# Altium PCB N303-3V1.0.pcbdoc (part 1 of 3)
Units mm, origin at the board's own origin, x right, y up, seen from the top; angles counter-clockwise.
Board outline 100 x 100 mm, 2 copper layers (Top Layer, Bottom Layer); 92 components, 15 nets, 360 pads, 304 vias.
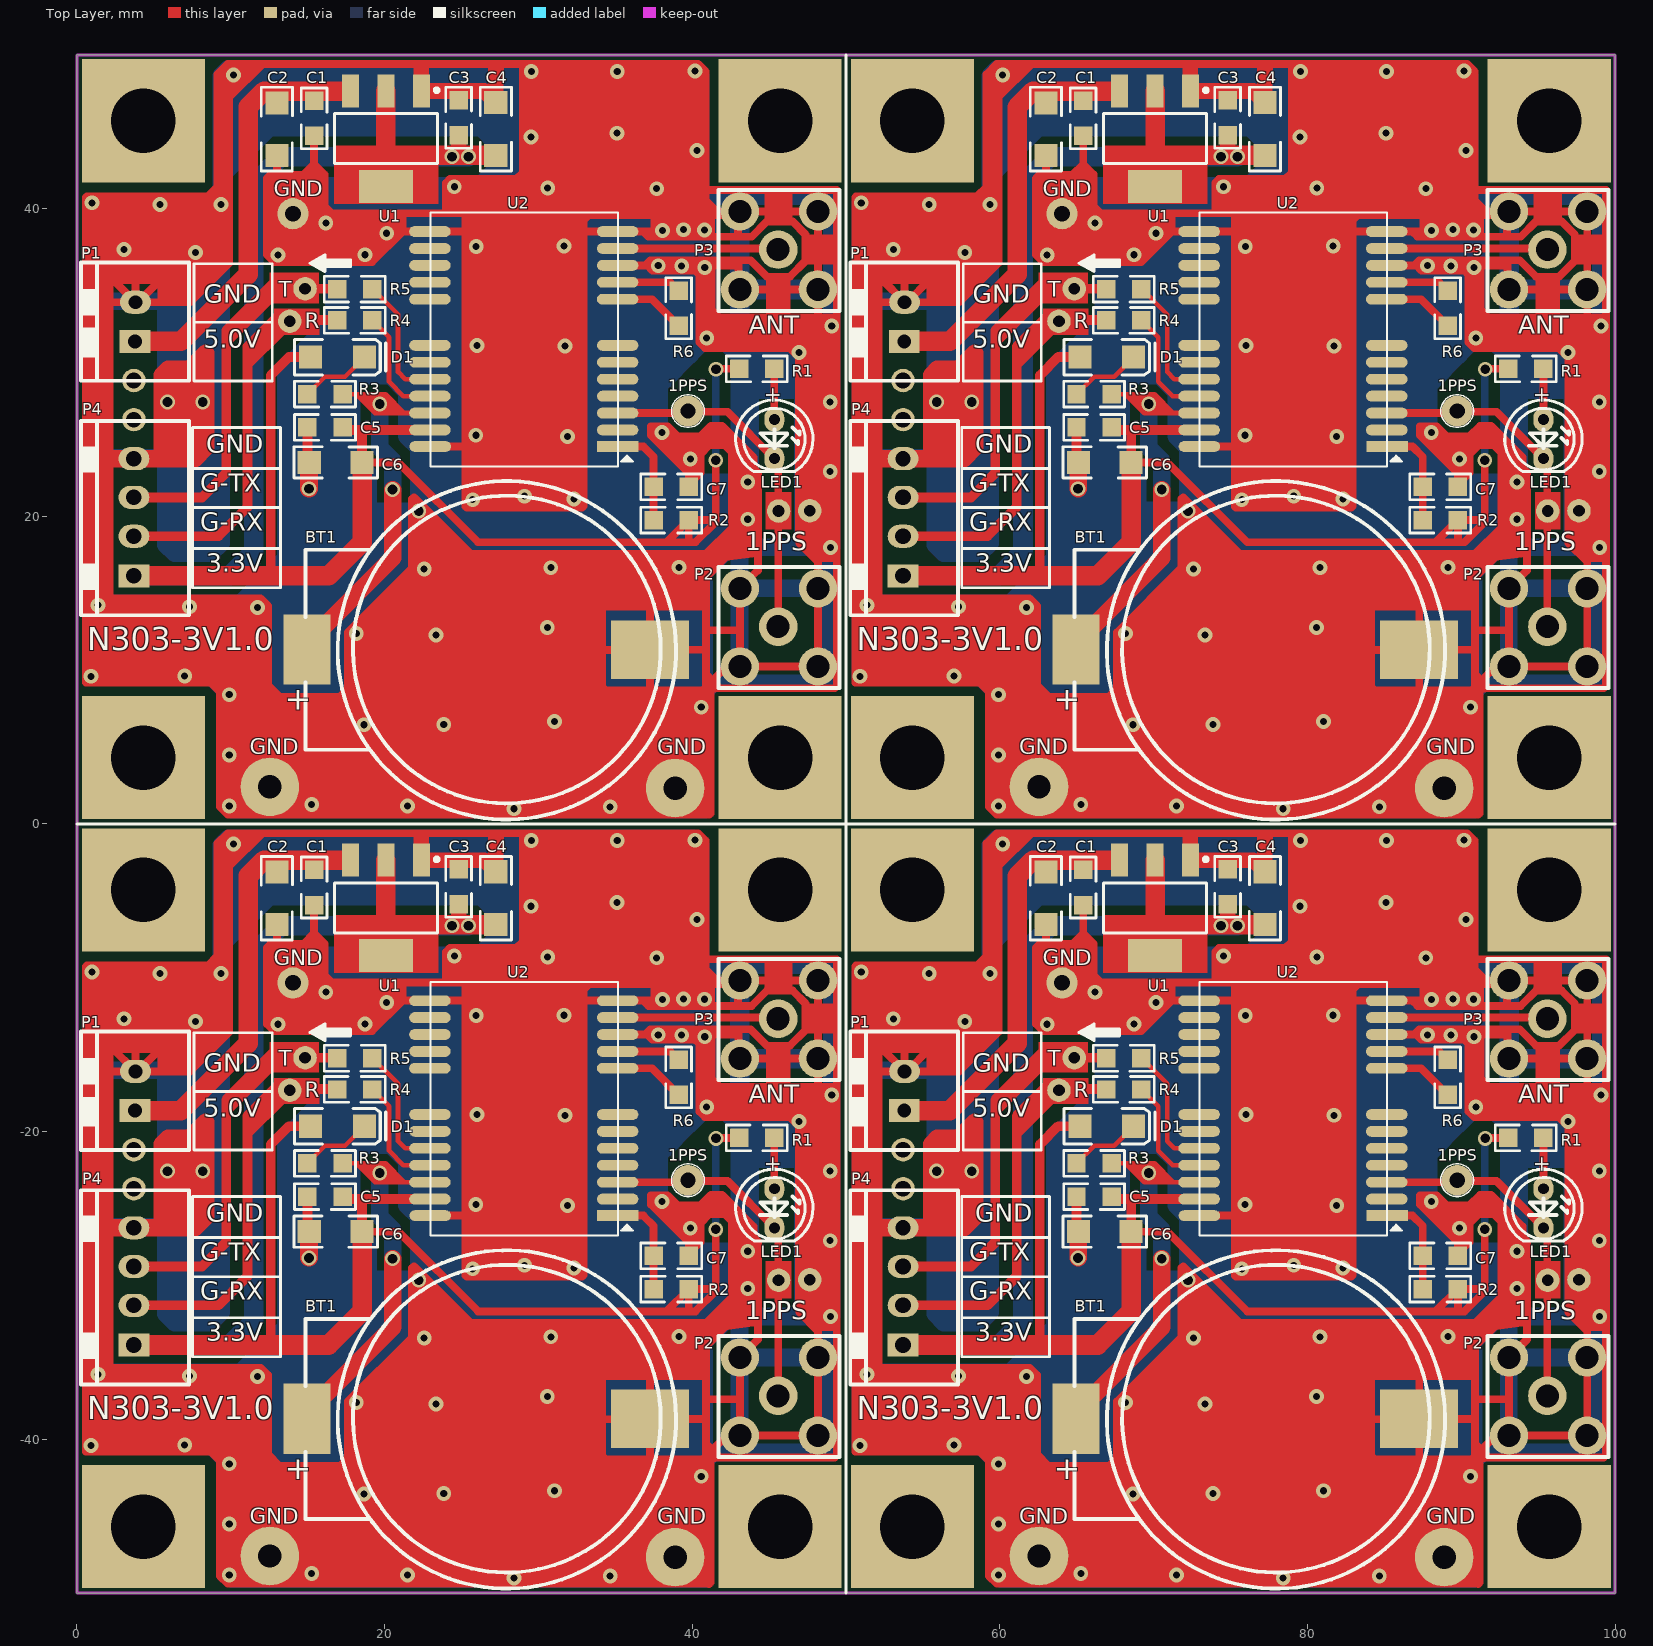
[diagram p0: Top Layer view]
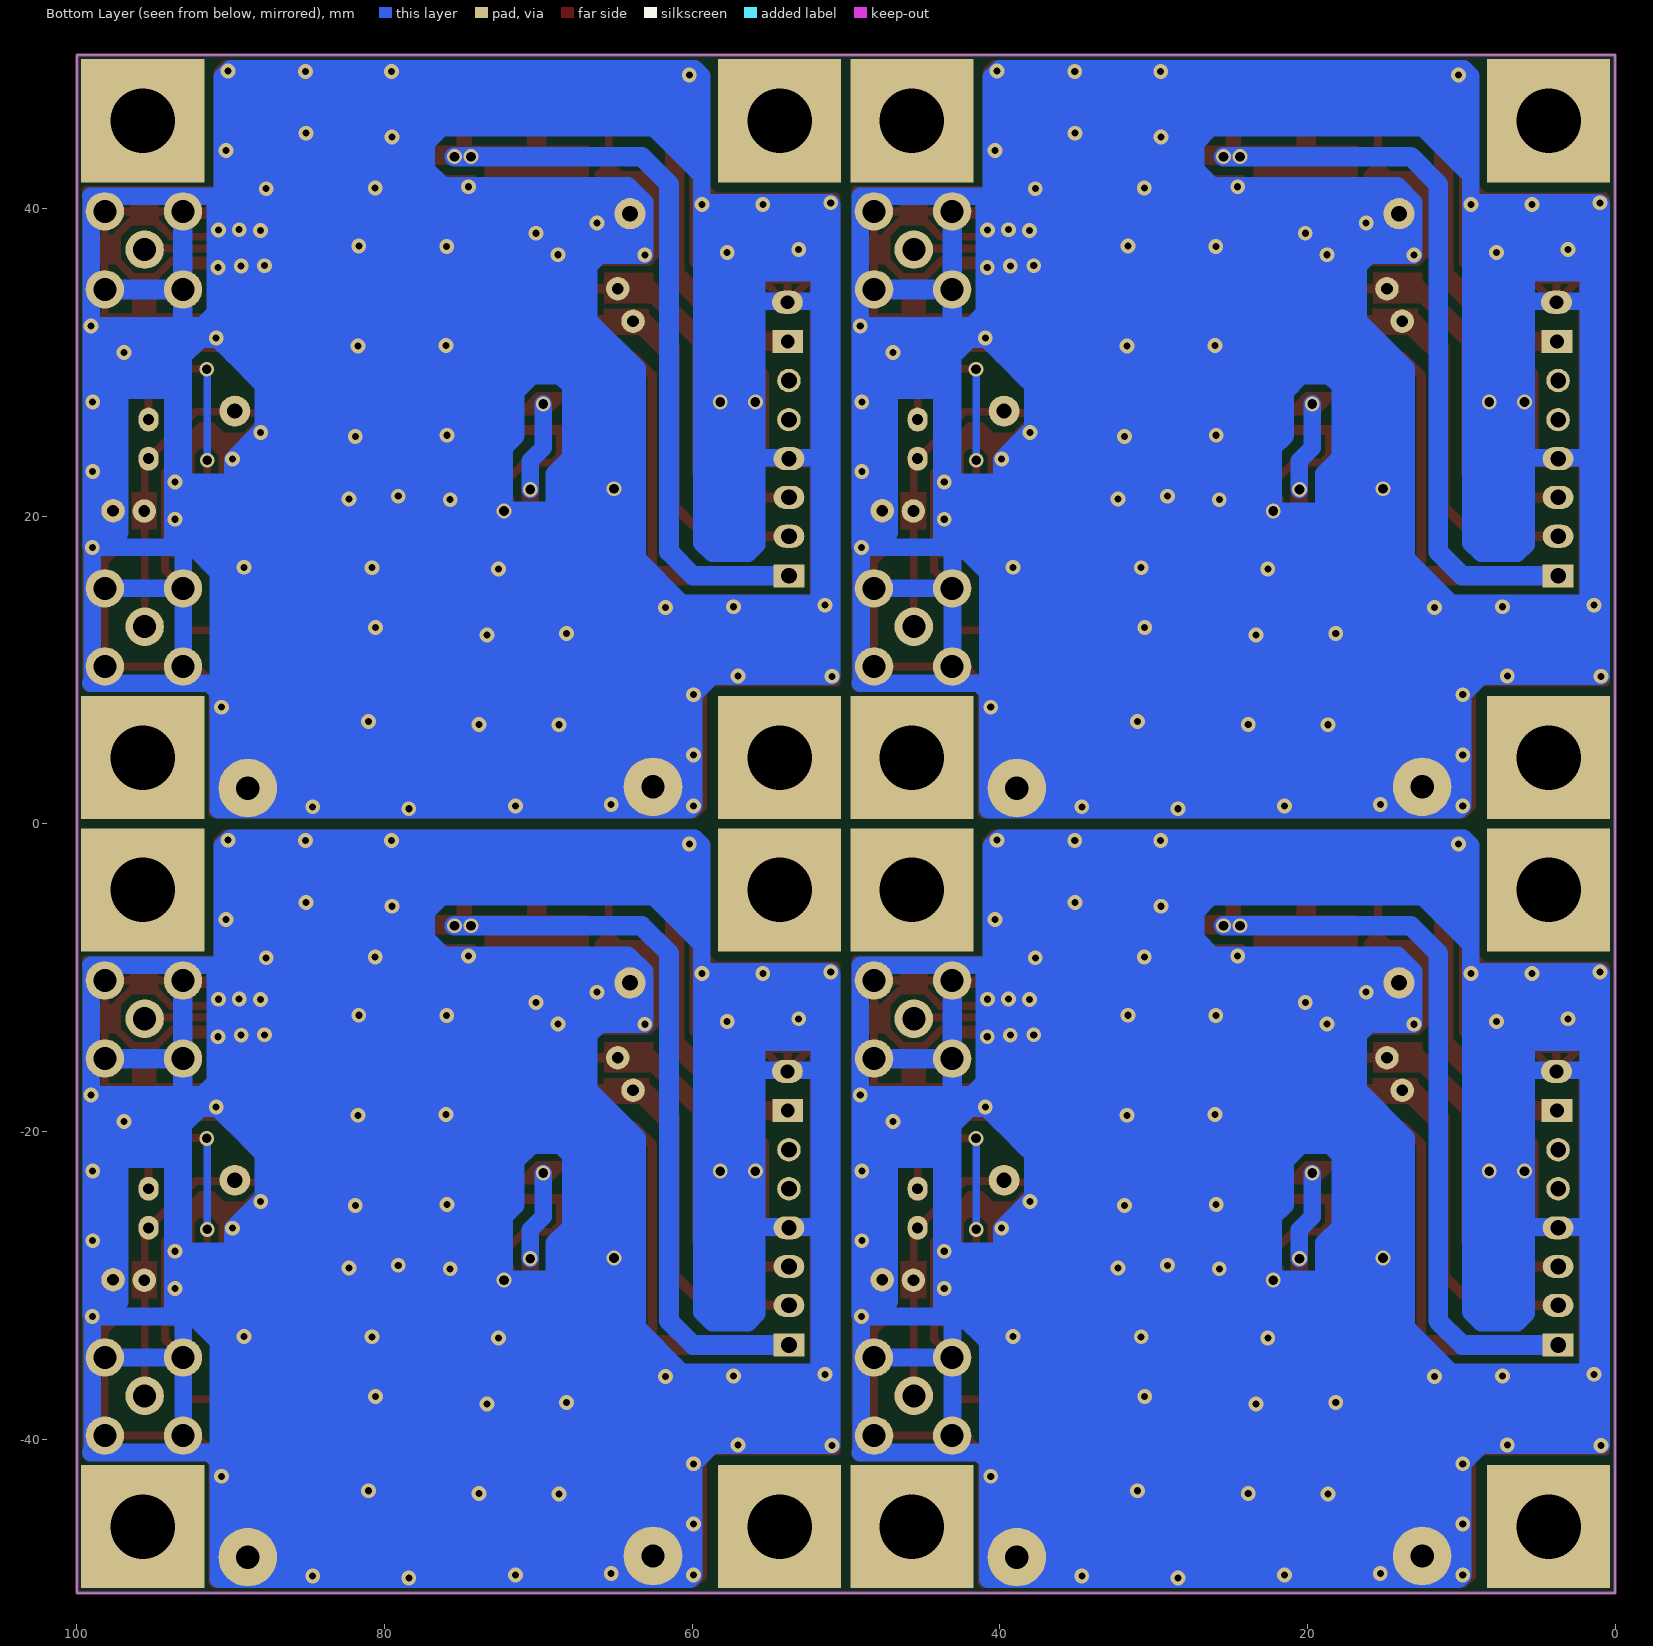
[diagram p1: Bottom Layer view, seen from below]

## Layer stack, top to bottom
Top Solder: solder mask 0.0102, Solder Resist, Dk 3.5
Top Layer: signal copper 0.0356
Dielectric 1: dielectric 0.32, FR-4, Dk 4.8
Bottom Layer: signal copper 0.0356
Bottom Solder: solder mask 0.0102, Solder Resist, Dk 3.5

## Board outline
0,50 100,50 100,-50 0,-50

## Design rules (kind name [scope] priority, off if disabled: settings)
Clearance [All] p1: gap=0.254
ComponentClearance [All] p1 off: gap=0.254 collisioncheckmode=3 verticalgap=0.254 showdistances=FALSE
PolygonConnect [All] p1: connectstyle=Relief reliefconductorwidth=0.254 reliefentries=4 polygonreliefangle="90 Angle" airgapwidth=0.254
RoutingVias [All] p1: holewidth=0.711 width=1.27 viastyle="Through Hole" minholewidth=0.711 minwidth=1.27 maxholewidth=0.711 maxwidth=1.27
SilkToBoardRegionClearance [All] p1 off:
SilkToSilkClearance [All] p1 off: silktosilkclearance=0.254
SilkToSolderMaskClearance [IsPad] p1 off: minsilkscreentomaskgap=0.254 clearancetoexposedcopper=TRUE
SolderMaskExpansion [All] p1: expansion=0.102
Width [All] p1: maxlimit=2.54 minlimit=0.254 preferedwidth=0.254 minimp=50.000000 maximp=50.000000 favimp=50.000000
26 further rules are at their usual default settings.

## Classes and differential pairs
component class N303-3V1.0: 1PPS BT1 C1 C2 C3 C4 C5 C6 C7 D1 LED1 P1 P2 P3 P4 R1 R2 R3 R4 R5 R6 U1 U2

## Components (designator, comment, footprint, x,y, rotation, side; value= is the part's Value field where it differs from the comment)
1PPS "TEST" 测试点（圆形） 89.726,-23.152 r0 top
1PPS "TEST" 测试点（圆形） 89.726,26.848 r0 top
1PPS "TEST" 测试点（圆形） 39.726,-23.152 r0 top
1PPS "TEST" 测试点（圆形） 39.726,26.848 r0 top
BT1 "电池座 小" "电池座 2032 贴片 BS-8" 88.964,-38.672 r90 top locked
BT1 "电池座 小" "电池座 2032 贴片 BS-8" 88.964,11.328 r90 top locked
BT1 "电池座 小" "电池座 2032 贴片 BS-8" 38.964,-38.672 r90 top locked
BT1 "电池座 小" "电池座 2032 贴片 BS-8" 38.964,11.328 r90 top locked
C1 "0.1uF" 0805 65.418,-5.271 r90 top
C1 "0.1uF" 0805 65.418,44.729 r90 top
C1 "0.1uF" 0805 15.418,-5.271 r90 top
C1 "0.1uF" 0805 15.418,44.729 r90 top
C2 "10uF" 1206 63.005,-6.541 r90 top
C2 "10uF" 1206 63.005,43.459 r90 top
C2 "10uF" 1206 13.005,-6.541 r90 top
C2 "10uF" 1206 13.005,43.459 r90 top
C3 "0.1uF" 0805 74.816,-2.944 r270 top
C3 "0.1uF" 0805 74.816,47.056 r270 top
C3 "0.1uF" 0805 24.816,-2.944 r270 top
C3 "0.1uF" 0805 24.816,47.056 r270 top
C4 "10uF" 1206 77.229,-3.112 r270 top
C4 "10uF" 1206 77.229,46.888 r270 top
C4 "10uF" 1206 27.229,-3.112 r270 top
C4 "10uF" 1206 27.229,46.888 r270 top
C5 "0.1uF" 0805 64.986,-24.219 r0 top
C5 "0.1uF" 0805 64.986,25.781 r0 top
C5 "0.1uF" 0805 14.986,-24.219 r0 top
C5 "0.1uF" 0805 14.986,25.781 r0 top
C6 "10uF" 1206 65.113,-26.505 r0 top
C6 "10uF" 1206 65.113,23.495 r0 top
C6 "10uF" 1206 15.113,-26.505 r0 top
C6 "10uF" 1206 15.113,23.495 r0 top
C7 "0.1uF" 0805 89.776,-28.08 r180 top
C7 "0.1uF" 0805 89.776,21.92 r180 top
C7 "0.1uF" 0805 39.776,-28.08 r180 top
C7 "0.1uF" 0805 39.776,21.92 r180 top
D1 "1N5819" "二极管 贴片 IN4148" 65.2,-19.647 r0 top
D1 "1N5819" "二极管 贴片 IN4148" 65.2,30.353 r0 top
D1 "1N5819" "二极管 贴片 IN4148" 15.2,-19.647 r0 top
D1 "1N5819" "二极管 贴片 IN4148" 15.2,30.353 r0 top
LED1 "红色" LED5_单色 95.339,-23.711 r270 top
LED1 "红色" LED5_单色 95.339,26.289 r270 top
LED1 "红色" LED5_单色 45.339,-23.711 r270 top
LED1 "红色" LED5_单色 45.339,26.289 r270 top
P1 "XH2.54-2" VH2.54_2 53.784,-18.631 r270 top
P1 "XH2.54-2" VH2.54_2 53.784,31.369 r270 top
P1 "XH2.54-2" VH2.54_2 3.784,-18.631 r270 top
P1 "XH2.54-2" VH2.54_2 3.784,31.369 r270 top
P2 "SMA" "天线座 50ohm 直立" 95.593,-37.173 r0 top
P2 "SMA" "天线座 50ohm 直立" 95.593,12.827 r0 top
P2 "SMA" "天线座 50ohm 直立" 45.593,-37.173 r0 top
P2 "SMA" "天线座 50ohm 直立" 45.593,12.827 r0 top
P3 "SMA" "天线座 50ohm 直立" 95.593,-12.662 r0 top
P3 "SMA" "天线座 50ohm 直立" 95.593,37.338 r0 top
P3 "SMA" "天线座 50ohm 直立" 45.593,-12.662 r0 top
P3 "SMA" "天线座 50ohm 直立" 45.593,37.338 r0 top
P4 "XH2.54-4" VH2.54_4 53.708,-33.871 r270 top
P4 "XH2.54-4" VH2.54_4 53.708,16.129 r270 top
P4 "XH2.54-4" VH2.54_4 3.708,-33.871 r270 top
P4 "XH2.54-4" VH2.54_4 3.708,16.129 r270 top
R1 "1K" 0805 93.053,-20.409 r0 top
R1 "1K" 0805 93.053,29.591 r0 top
R1 "1K" 0805 43.053,-20.409 r0 top
R1 "1K" 0805 43.053,29.591 r0 top
R2 "10K" 0805 89.776,-30.239 r180 top
R2 "10K" 0805 89.776,19.761 r180 top
R2 "10K" 0805 39.776,-30.239 r180 top
R2 "10K" 0805 39.776,19.761 r180 top
R3 "100" 0805 64.986,-22.06 r0 top
R3 "100" 0805 64.986,27.94 r0 top
R3 "100" 0805 14.986,-22.06 r0 top
R3 "100" 0805 14.986,27.94 r0 top
R4 "0" 0805 66.916,-17.259 r0 top
R4 "0" 0805 66.916,32.741 r0 top
R4 "0" 0805 16.916,-17.259 r0 top
R4 "0" 0805 16.916,32.741 r0 top
R5 "0" 0805 66.916,-15.227 r0 top
R5 "0" 0805 66.916,34.773 r0 top
R5 "0" 0805 16.916,-15.227 r0 top
R5 "0" 0805 16.916,34.773 r0 top
R6 "0" 0805 89.116,-17.615 r90 top
R6 "0" 0805 89.116,32.385 r90 top
R6 "0" 0805 39.116,-17.615 r90 top
R6 "0" 0805 39.116,32.385 r90 top
U1 "SPX1117M3-3.3" SOT223 72.403,-2.35 r180 top
U1 "SPX1117M3-3.3" SOT223 72.403,47.65 r180 top
U1 "SPX1117M3-3.3" SOT223 22.403,-2.35 r180 top
U1 "SPX1117M3-3.3" SOT223 22.403,47.65 r180 top
U2 "N303-3" "模块 N303-3" 85.179,-26.759 r90 top
U2 "N303-3" "模块 N303-3" 85.179,23.241 r90 top
U2 "N303-3" "模块 N303-3" 35.179,-26.759 r90 top
U2 "N303-3" "模块 N303-3" 35.179,23.241 r90 top

## Footprints (in the part's own frame and the unit in brackets; to place one, negate y for a bottom-side part, rotate by r counter-clockwise, add the part's x,y. Pads: shape width x height; smd on the part's side, far side on the other; paste and mask are expansions set on the pad)
0805 [mm]
  rect 1.2x1.2 smd: 1(0,0) 2(2.286,0)
  silkscreen extent -0.84,-0.84 3.12,0.84
1206 [mm]
  rect 1.5x1.5 smd: 1(-0.005,0) 2(3.424,0)
  silkscreen extent -1.01,-1.01 4.43,1.02
LED5_单色 [mm]
  oval 1.554x1.3 hole 0.711: 1(0,0) 2(2.54,0)
  silkscreen extent -1.27,-2.51 3.39,2.51
SOT223 [mm] "SOT-223/SC-73; 4 Leads; Body 6.7 x 7.3 mm, inc. leads (LxW max)"
  rect 1.1x2.15 smd: 1(0.011,-0.001) 2(2.311,-0.001) 3(4.611,-0.001)
  rect 3.5x2.15 smd: 4(2.311,6.199)
  silkscreen extent -1.11,-0.18 5.66,4.72
VH2.54_2 [mm]
  rect 1.5x2 hole 0.9: 1(0,0)
  oval 1.5x2 hole 0.9: 2(-2.55,0.025)
  silkscreen extent -5.14,-3.51 2.56,3.51
VH2.54_4 [mm]
  rect 1.5x2 hole 1.016: 1(0,0)
  oval 1.5x2 hole 1.016: 2(-2.58,0) 3(-5.105,0)
  oval 1.5x2 hole 1: 4(-7.62,0)
  silkscreen extent -10.06,-3.43 2.56,3.58
"二极管 贴片 IN4148" [mm] "SMT LED; 2 Flat Leads"
  rect 1.5x1.5 smd: 1(0,0) 2(3.5,0)
  silkscreen extent -1.04,-1.15 4.88,1.15
"天线座 50ohm 直立" [mm]
  round 2.5 hole 1.5: 1(0,0) 2(-2.49,-2.59) 2(-2.49,2.49) 2(2.584,-2.584) 2(2.59,2.49)
  silkscreen extent -3.89,-3.99 3.99,3.89
"模块 N303-3" [mm]
  rect 0.7x2.7 smd: 1(1.3,0.005)
  oval 0.7x2.7 smd: 2(2.375,0.025) 3(3.475,0.025) 4(4.575,0.025) 5(5.675,0.025) 6(6.775,0.025) 7(7.875,0.025) 8(10.875,0.029) 9(11.975,0.025) 10(13.075,0.025) 11(14.175,0.025) 12(15.275,0.025) 13(15.275,12.225) 14(14.175,12.225) 15(13.075,12.225) 16(11.975,12.225) 17(10.875,12.229) 18(7.875,12.225) 19(6.775,12.225) 20(5.675,12.225) 21(4.575,12.225) 22(3.475,12.225) 23(2.375,12.225) 24(1.3,12.205)
  silkscreen extent 0,-0.97 16.5,12.2
测试点（圆形） [mm]
  round 2 hole 1: 1(0,0)
  silkscreen extent -1.07,-1.06 1.07,1.06
"电池座 2032 贴片 BS-8" [mil]
  rect 180x120 smd: 1(0.5,944.88)
  rect 150x200 smd: 2(0,67)
  silkscreen extent -434,0 431,949

## Part data
1PPS 1PPS 1PPS 1PPS: library part 测试点_小
C1 C1 C1 C1 C2 C2 C2 C2 C3 C3 C3 C3 C4 C4 C4 C4 C5 C5 C5 C5 C6 C6 C6 C6 C7 C7 C7 C7: library part "电容 贴片 0805"
D1 D1 D1 D1: library part "二极管 贴片 1N4148"
LED1 LED1 LED1 LED1: library part "贴片发光二极管 0805"
P1 P1 P1 P1: library part "连接件 XH2.54-2"
P2 P2 P2 P2 P3 P3 P3 P3: library part "联结件 天线座 SMA"
P4 P4 P4 P4: library part "联结件 XH2.54-4"
R1 R1 R1 R1 R2 R2 R2 R2 R3 R3 R3 R3 R4 R4 R4 R4 R5 R5 R5 R5 R6 R6 R6 R6: library part "电阻 贴片 0805"
U1 U1 U1 U1: library part "贴片芯片 SPX1117M3-3.3", "LDO"
U2 U2 U2 U2: library part "模块 N303-3"

## Free pads (board coordinates)
  round 1.524 hole 1.016: 0(3.708,-23.711) 0(3.708,26.289) 0(53.708,-23.711) 0(53.708,26.289) 1(3.708,-21.171) 1(3.708,28.829) 1(53.708,-21.171) 1(53.708,28.829)
  round 3.81 hole 1.524: 2(12.548,-47.587) 2(12.548,2.413) 2(38.887,-47.663) 2(38.887,2.337) 2(62.548,-47.587) 2(62.548,2.413) 2(88.887,-47.663) 2(88.887,2.337)
  round 1.524 hole 0.762: 3(13.843,-17.31) 3(13.843,32.69) 3(14.834,-15.202) 3(14.834,34.798) 3(45.618,-29.655) 3(45.618,20.345) 3(47.65,-29.629) 3(47.65,20.371) 3(63.843,-17.31) 3(63.843,32.69) 3(64.834,-15.202) 3(64.834,34.798) 3(95.618,-29.655) 3(95.618,20.345) 3(97.65,-29.629) 3(97.65,20.371)
  round 2.032 hole 1.016: 3(14.046,-10.325) 3(14.046,39.675) 3(64.046,-10.325) 3(64.046,39.675)
  rect 8x8 hole 4.2: ""(4.318,-45.682) ""(4.318,-4.28) ""(4.318,4.318) ""(4.318,45.72) ""(45.72,-45.682) ""(45.72,-4.28) ""(45.72,4.318) ""(45.72,45.72) ""(54.318,-45.682) ""(54.318,-4.28) ""(54.318,4.318) ""(54.318,45.72) ""(95.72,-45.682) ""(95.72,-4.28) ""(95.72,4.318) ""(95.72,45.72)

## Via types
v1: diameter 0.965, hole 0.457, Top Layer to Bottom Layer, 264 vias
v2: diameter 0.965, hole 0.635, Top Layer to Bottom Layer, 40 vias

## Nets (pads, with @x,y where several pads share a name; then routed paths per layer and width w, separated by ;. In a path a pad name is that pad's centre, name@x,y a point inside that pad or via, vN(x,y) a via of type N, cw(c..) or ccw(c..) an arc to the next point about the centre after c; other vN are vias at no path point)
3.3V: C3.2@24.816,44.77 C4.2@27.229,43.464 C5.2@17.272,25.781 C6.2@18.537,23.495 D1.1@15.2,30.353 P4.1@3.708,16.129 R1.1@43.053,29.591 R2.1@39.776,19.761 U1.2@20.091,47.652 U1.4@20.091,41.452 U2.23@22.954,25.616 | length 148.9
  Top Layer w0.508: C6.2@18.537,23.495 20.904,23.495 26.086,18.313 38.329,18.313 ; v2(41.529,23.647) 41.529,19.634 ; v2(41.554,29.566) 41.58,29.591 R1.1@43.053,29.591 ; 38.329,18.313 39.802,18.313 ; 38.329,18.313 R2.1@39.776,19.761 ; R2.1@39.776,19.761 39.776,18.339 39.802,18.313 ; R2.1@39.776,19.761 41.402,19.761 41.529,19.634 ; 39.802,18.313 40.208,18.313 41.529,19.634
  Top Layer w0.635: 12.598,16.332 12.598,29.159 13.792,30.353 D1.1@15.2,30.353 ; C5.2@17.272,25.781 17.437,25.616 18.567,25.616 ; C6.2@18.537,23.495 18.537,25.585 18.567,25.616 ; U2.23@22.954,25.616 18.567,25.616
  Top Layer w1.016: v2@24.79,43.464 24.816,43.49 C3.2@24.816,44.77
  Top Layer w1.27: P4.1@3.708,16.129 16.358,16.129 18.537,18.308 C6.2@18.537,23.495 ; U1.4@20.091,41.452 20.091,43.485 ; U1.2@20.091,47.652 20.091,43.485 ; C4.2@27.229,43.464 24.79,43.464 20.112,43.464 20.091,43.485
  Bottom Layer w0.508: v2(41.529,23.647) 41.529,29.54 v2(41.554,29.566)
  Bottom Layer w1.27: P4.1@3.708,16.129 9.931,16.129 11.506,17.704 11.506,41.605 13.284,43.383 v2(25.451,43.383)
  other v2: 24.384,43.383
5V: C1.2@15.418,47.015 C2.2@13.005,46.883 P1.1@3.784,31.369 U1.3@17.791,47.652 | length 28.3
  Top Layer w1.27: P1.1@3.784,31.369 6.756,31.369 11.125,35.738 11.125,46.609 12.167,47.65 ; 11.151,46.634 12.167,47.65 ; U1.3@17.501,47.65 12.167,47.65
GND: BT1.2@37.262,11.328 C1.1@15.418,44.729 C2.1@13.005,43.454 C3.1@24.816,47.056 C4.1@27.229,46.893 C5.1@14.986,25.781 C6.1@15.108,23.495 C7.1@39.776,21.92 P1.2@3.809,33.919 P2.2@43.103,10.237 P2.2@43.103,15.317 P2.2@48.177,10.243 P2.2@48.183,15.317 P3.2@43.103,34.748 P3.2@43.103,39.828 P3.2@48.177,34.754 P3.2@48.183,39.828 P4.4@3.708,23.749 pad.2@12.548,2.413 pad.2@38.887,2.337 pad.3@14.046,39.675 pad.3@47.65,20.371 U1.1@22.391,47.652 U2.10@35.154,36.316 U2.12@35.154,38.516 U2.13@22.954,38.516 U2.24@22.974,24.541 | length 1381.2
  Top Layer w0.508: 5.512,35.458 5.486,35.433 ; 7.315,34.265 7.264,34.214 5.486,34.214 ; 8.103,35.052 8.001,34.95 5.486,34.95 ; C2.1@13.005,43.454 13.005,42.189 ; C1.1@15.418,44.729 15.418,42.901 ; 21.793,21.133 21.793,17.551 ; 21.92,21.234 25.629,17.526 ; U2.24@22.974,24.541 25.273,24.541 ; 26.086,24.536 26.081,24.541 25.273,24.541 ; 33.579,39.878 33.299,39.599 ; U2.10@35.154,36.316 36.951,36.316 ; v1@37.719,38.456 37.659,38.516 36.822,38.516 ; C7.1@39.776,21.92 C7.1@39.776,22.073 ; 41.707,17.323 40.894,16.51 ; 42.189,17.348 40.894,16.053 ; P3.2@42.545,39.599 33.299,39.599 ; P3.2@48.177,34.754 48.171,34.748 45.618,34.748 ; 1.651,40.792 0.648,40.792 0.597,40.742 0.597,9.195 8.712,9.195 9.296,8.611 9.296,1.118 9.804,0.61 40.792,0.61 ; 1.651,40.792 2.134,40.31 2.134,35.458 ; 1.651,40.792 4.267,40.792 ; 2.134,33.96 2.134,23.749 2.134,14.732 2.21,14.656 11.938,14.656 12.421,14.173 12.421,9.017 13.183,8.255 17.094,8.255 17.628,8.788 17.628,12.471 21.793,16.637 21.793,17.551 ; 2.134,33.96 2.134,35.458 ; 2.134,33.96 2.174,33.919 P1.2@3.809,33.919 ; 2.134,35.458 2.27,35.458 P1.2@3.809,33.919 ; P1.2@3.809,33.919 3.809,40.334 4.216,40.742 ; P1.2@3.809,33.919 P1.2@3.972,33.919 ; P1.2@3.972,33.919 5.486,33.919 ; P1.2@3.972,33.919 5.486,35.433 ; 4.216,40.742 8.458,40.742 8.509,40.792 ; 4.216,40.742 4.267,40.792 ; 4.267,40.792 8.509,40.792 ; 5.486,33.919 5.486,34.214 ; 5.486,33.919 7.351,33.919 7.887,34.455 ; 5.486,34.214 5.486,34.569 ; 5.486,34.569 5.486,34.95 ; 5.486,34.569 7.772,34.569 7.887,34.455 ; 5.486,34.95 5.486,35.433 ; 7.887,34.455 9.906,36.474 9.906,47.244 12.065,49.403 ; 8.509,40.792 9.144,41.427 9.144,48.743 9.804,49.403 12.065,49.403 ; 12.065,49.403 29.083,49.403 ; 13.005,42.189 13.005,37.211 13.691,36.525 ; 13.005,42.189 14.707,42.189 ; 13.005,42.189 12.573,42.189 12.344,41.961 12.344,37.008 12.827,36.525 13.691,36.525 ; 13.691,36.525 19.177,36.525 21.167,38.516 ; 14.707,42.189 15.443,42.189 ; 14.707,42.189 15.418,42.901 ; 15.418,42.901 15.418,42.215 15.443,42.189 ; 15.418,42.901 16.104,42.215 ; 15.443,42.189 16.078,42.189 16.104,42.215 ; 16.104,42.215 16.104,40.157 16.561,39.7 21.234,39.7 ; 21.167,38.516 21.167,39.633 21.234,39.7 ; 21.167,38.516 U2.13@22.954,38.516 25.273,38.516 ; 21.234,39.7 23.876,39.7 ; 21.793,17.551 21.819,17.526 25.629,17.526 ; 23.876,39.7 25.273,39.7 ; 23.876,39.7 24.003,39.827 24.003,41.681 24.257,41.935 28.575,41.935 28.981,42.342 ; 25.273,24.541 25.273,38.516 ; 25.273,24.541 25.273,20.65 25.349,20.574 32.842,20.574 32.944,20.676 32.944,38.516 ; 25.273,38.516 25.527,38.516 ; 25.273,38.516 25.273,39.7 ; 25.273,39.7 25.502,39.7 ; 25.502,39.7 27.737,39.7 28.981,40.945 28.981,42.342 ; 25.502,39.7 25.502,38.541 25.527,38.516 ; 25.527,38.516 32.766,38.516 ; 25.629,17.526 25.654,17.551 40.894,17.551 ; 28.981,42.342 28.981,49.301 29.083,49.403 ; 29.083,49.403 40.386,49.403 40.869,48.92 40.869,41.046 ; 32.766,38.516 32.944,38.516 ; 32.766,38.516 32.766,39.243 33.122,39.599 33.299,39.599 ; 32.944,38.516 U2.12@35.154,38.516 36.822,38.516 ; 32.944,38.516 32.944,39.243 33.299,39.599 ; 34.036,11.303 34.036,13.868 34.29,14.122 37.262,14.122 ; 34.036,11.303 34.036,9.017 34.366,8.687 37.313,8.687 ; 34.036,11.303 37.236,11.303 BT1.2@37.262,11.328 ; 36.822,38.516 37.16,38.178 42.977,38.178 ; 36.951,36.316 37.076,36.316 ; 36.951,36.316 37.289,36.654 43.002,36.654 ; 37.076,36.316 41.377,36.316 ; 37.076,36.316 37.414,35.978 38.568,35.978 38.583,35.992 40.183,35.992 40.462,35.712 40.462,31.318 40.843,30.937 46.355,30.937 46.965,30.328 46.965,18.262 48.183,17.043 ; BT1.2@37.262,11.328 37.262,14.122 ; BT1.2@37.262,11.328 37.262,8.738 37.313,8.687 ; BT1.2@37.262,11.328 40.818,11.328 40.894,11.405 ; 37.262,14.122 40.894,14.122 ; 37.313,8.687 40.792,8.687 ; C7.1@39.776,22.073 39.776,22.809 37.313,25.273 37.313,25.857 38.405,25.857 39.065,25.197 40.538,25.197 41.224,25.883 41.935,25.883 43.993,23.825 43.993,23.139 44.272,22.86 44.272,16.486 P2.2@43.103,15.317 43.103,12.497 ; C7.1@39.776,22.073 40.538,22.835 40.538,24.058 41.119,24.638 42.113,24.638 42.596,24.155 42.596,19.253 40.894,17.551 ; 40.792,0.61 40.792,8.687 ; 40.792,0.61 41.084,0.61 41.097,0.597 41.183,0.683 41.183,8.788 ; 40.792,0.61 40.894,0.711 40.894,8.788 ; 40.792,8.687 40.792,8.788 ; 40.792,8.687 40.894,8.788 ; 40.792,8.788 40.894,8.89 ; 40.792,8.788 40.894,8.788 ; 40.869,41.046 40.869,40.538 41.579,39.828 P3.2@43.103,39.828 ; 40.869,41.046 41.034,41.212 49.403,41.212 49.403,32.944 ; 40.894,8.788 41.183,8.788 ; 40.894,8.788 40.894,8.89 ; 40.894,8.89 41.307,9.303 ; 40.894,8.89 40.894,9.715 ; 40.894,9.715 40.894,11.405 ; 40.894,9.715 41.307,9.303 ; 40.894,11.405 40.894,12.598 ; 40.894,12.598 40.894,14.122 ; 40.894,12.598 43.001,12.598 43.103,12.497 ; 40.894,14.122 40.894,16.053 ; 40.894,16.053 40.894,16.51 ; 40.894,16.51 40.894,17.551 ; 41.183,8.788 41.472,8.788 41.51,8.826 41.783,8.826 ; 41.307,9.303 42.241,10.237 P2.2@43.103,10.237 ; 41.307,9.303 41.783,8.826 ; 41.377,36.316 42.996,36.316 43.002,36.322 ; 41.377,36.316 41.25,36.189 41.25,33.452 41.783,32.918 45.72,32.918 ; 41.783,8.826 49.263,8.826 49.403,8.966 49.403,32.944 ; 42.977,38.178 43.867,38.178 44.856,39.167 45.695,39.167 ; 42.977,38.178 42.977,39.702 P3.2@43.103,39.828 ; 43.002,36.322 43.002,36.654 ; 43.002,36.322 43.002,34.849 P3.2@43.103,34.748 45.618,34.748 ; 43.002,36.654 43.791,36.654 44.865,35.58 45.669,35.58 ; P2.2@43.103,10.237 43.103,12.497 ; P2.2@43.103,10.237 48.171,10.237 P2.2@48.177,10.243 48.183,10.249 P2.2@48.183,15.317 48.183,17.043 ; P3.2@43.103,39.828 45.669,39.828 ; 45.618,34.748 45.618,33.02 45.72,32.918 ; 45.618,34.748 45.669,34.799 45.669,35.58 ; 45.669,35.58 46.35,35.58 47.371,36.601 47.371,37.465 ; 45.669,39.828 P3.2@48.183,39.828 48.183,37.414 ; 45.669,39.828 45.695,39.803 45.695,39.167 ; 45.695,39.167 46.533,39.167 47.371,38.329 47.371,37.465 ; 45.72,32.918 48.183,32.918 ; 47.371,37.465 48.132,37.465 48.183,37.414 ; 48.183,17.043 48.183,32.918 ; 48.183,32.918 48.183,37.414 ; 48.183,32.918 49.378,32.918 49.403,32.944
  Top Layer w0.635: C5.1@14.986,25.781 14.986,23.617 C6.1@15.108,23.495
  Top Layer w1.016: 22.377,49.149 22.391,49.135 U1.1@22.391,47.652 26.471,47.652 C4.1@27.229,46.893 27.229,49.124 27.254,49.149
  Top Layer w1.143: 0.914,23.749 2.134,23.749 P4.4@3.708,23.749 7.645,23.749 8.382,24.486 8.382,30.607 7.341,29.566 5.944,29.566 5.563,29.185 5.563,24.003 5.385,23.825 ; v2(15.088,21.793) 15.088,23.475 C6.1@15.108,23.495
  Bottom Layer w0.508: 43.078,31.521 43.103,31.546 43.103,32.333 43.103,32.385
  Bottom Layer w1.143: v1(5.41,40.284) 5.791,39.903 5.791,33.985 ; v2(15.088,21.793) 16.535,20.345 18.948,20.345 ; 38.76,40.31 39.268,40.818 40.538,40.818 ; v1(40.945,31.598) v1@40.869,31.521 ; P2.2@43.103,10.237 43.078,10.262 43.078,17.983 ; P2.2@43.103,15.317 P2.2@48.183,15.317 ; v1(43.612,22.225) 43.078,22.225 ; v1@0.914,14.351 0.914,40.31 v1(0.991,40.386) 2.337,40.386 ; v1@0.914,14.351 v1(0.914,9.601) 1.753,9.601 ; v1@0.914,14.351 v1@1.753,14.351 ; 1.753,9.601 v1@1.753,14.351 ; 1.753,9.601 8.712,9.601 v1(9.906,8.407) v1(9.906,4.496) v1(9.906,1.168) 9.906,1.143 10.135,0.914 40.792,0.914 40.792,8.56 ; v1@1.753,14.351 1.753,23.8 ; v1@1.753,14.351 10.668,14.351 13.589,17.272 13.589,18.186 ; 1.753,23.8 1.753,33.985 ; 1.753,23.8 5.791,23.8 ; 1.753,33.985 1.753,39.802 2.337,40.386 ; 1.753,33.985 5.791,33.985 ; 2.337,40.386 9.271,40.386 v1(9.373,40.284) ; 5.791,23.8 5.791,33.985 ; 5.791,23.8 5.791,18.148 6.35,17.59 8.7,17.59 9.373,18.263 9.373,23.901 ; 5.791,23.8 9.271,23.8 9.373,23.901 ; 5.791,33.985 9.373,33.985 ; 9.373,23.901 9.373,33.985 ; 9.373,33.985 v1(9.373,40.284) ; v1(9.373,40.284) 9.373,42.139 ; 9.373,42.139 9.373,48.628 9.83,49.086 40.043,49.086 v1(40.183,48.946) 40.538,48.59 40.538,41.453 ; 9.373,42.139 12.497,45.263 26.289,45.263 27.28,44.272 27.28,42.57 26.187,41.478 ; 13.589,18.186 13.589,29.616 16.713,32.741 ; 13.589,18.186 13.792,17.983 22.25,17.983 ; 16.713,32.741 17.069,32.385 21.996,32.385 ; 16.713,32.741 16.713,36.271 16.002,36.982 v1(13.081,36.982) 13.081,40.411 14.148,41.478 26.187,41.478 ; 18.948,20.345 v2(22.225,20.345) ; 18.948,20.345 18.948,22.758 17.882,23.825 17.882,28.448 18.593,29.159 18.618,29.134 20.396,29.134 21.463,28.067 21.463,25.222 22.225,24.46 ; 21.996,32.385 41.834,32.385 ; 21.996,32.385 22.225,32.156 22.225,31.521 ; v2(22.225,20.345) 22.225,18.009 22.25,17.983 ; v2(22.225,20.345) 22.225,24.46 ; 22.225,24.46 22.225,31.521 ; 22.225,31.521 39.218,31.521 ; 22.25,17.983 42.443,17.983 ; 26.187,41.478 40.513,41.478 40.538,41.453 ; 37.871,28.524 37.871,29.591 ; 37.871,28.524 38.405,29.058 ; 37.871,28.524 37.871,25.629 v1(38.049,25.451) 38.151,25.451 v1(39.878,23.724) 39.878,22.682 39.827,22.631 40.234,22.225 43.078,22.225 ; 37.871,29.591 37.871,30.175 ; 37.871,29.591 38.405,29.058 ; 37.871,30.175 38.557,30.861 ; 37.871,30.175 39.522,30.175 ; 38.405,29.058 39.522,30.175 ; 38.557,30.861 39.218,31.521 ; 38.557,30.861 39.675,30.861 39.903,30.632 ; 39.218,31.521 39.903,31.521 ; 39.522,30.175 39.903,30.556 ; 39.903,30.556 39.941,30.594 ; 39.903,30.556 39.903,30.632 ; 39.903,30.632 39.941,30.594 ; 39.903,30.632 39.903,31.521 ; 39.903,31.521 v1@40.869,31.521 ; 39.941,30.594 v1@40.869,31.521 ; 40.538,40.818 41.173,40.818 ; 40.538,40.818 40.538,33.68 40.996,33.223 ; 40.538,40.818 40.538,41.453 ; 40.792,8.56 40.792,16.332 42.443,17.983 ; 40.792,8.56 40.794,8.56 41.378,9.143 49.086,9.143 48.997,9.232 v1(48.997,17.983) ; v1@40.869,31.521 41.961,31.521 ; 40.996,33.223 41.834,32.385 ; 40.996,33.223 40.996,40.64 41.173,40.818 ; 41.173,40.818 49.086,40.818 49.073,40.805 v1(49.073,32.385) ; 41.834,32.385 43.103,32.385 43.155,32.385 ; 41.961,31.521 43.078,31.521 ; 41.961,31.521 43.078,30.404 ; 42.443,17.983 43.078,17.983 ; 43.078,17.983 43.078,22.225 ; 43.078,17.983 43.866,17.983 ; 43.078,22.225 43.078,30.404 ; 43.078,30.404 43.078,31.521 ; 43.078,31.521 43.078,32.309 43.103,32.333 43.155,32.385 ; 43.155,32.385 43.764,32.385 ; 43.764,32.385 43.764,18.085 43.866,17.983 ; 43.764,32.385 47.168,32.385 ; 43.866,17.983 48.158,17.983 ; 47.168,32.385 48.133,32.385 ; 47.168,32.385 47.206,32.347 47.206,18.936 48.133,18.009 ; 48.133,18.009 48.133,32.385 ; 48.133,18.009 48.158,17.983 ; 48.133,32.385 v1(49.073,32.385) ; 48.158,17.983 v1(48.997,17.983) ; v1(48.997,17.983) 49.073,18.059 v1(49.073,32.385)
  Bottom Layer w1.27: 43.103,32.385 P3.2@43.103,34.748 ; P3.2@43.103,39.828 P3.2@43.103,34.748 ; P3.2@48.177,34.754 48.171,34.748 P3.2@43.103,34.748
  other v1: 28.423,0.991 34.671,1.118 21.488,1.168 15.265,1.27 18.669,6.452 23.851,6.477 31.039,6.655 40.589,7.595 7.01,9.627 23.343,12.294 18.161,12.395 30.582,12.776 11.735,14.072 7.315,14.122 1.372,14.224 22.581,16.586 30.81,16.662 39.141,16.688 43.612,19.812 25.73,21.082 32.309,21.133 29.108,21.311 48.971,22.911 31.902,25.197 25.933,25.273 48.971,27.432 46.939,30.658 31.725,31.064 26.01,31.115 40.818,36.17 39.319,36.271 37.795,36.297 18.72,37.008 7.722,37.16 3.073,37.338 25.959,37.541 31.674,37.567 20.142,38.405 38.075,38.583 40.792,38.608 39.446,38.633 16.18,39.065 37.694,41.3 30.607,41.351 24.536,41.427 40.31,43.79 29.515,44.653 35.103,44.907 10.185,48.692 29.54,48.92 35.128,48.92
  other v2: 5.893,27.432 8.179,27.432
GPS_1PPS: 1PPS.1@39.726,26.848 LED1.2@45.339,23.749 P2.1@45.593,12.827 pad.3@45.618,20.345 U2.3@35.154,26.716 | length 22.5
  Top Layer w0.508: U2.3@35.154,26.716 39.924,26.716 40.005,26.797 42.291,26.797 LED1.2@45.339,23.749 45.593,23.495 P2.1@45.593,12.827
GPS_RX: P4.2@3.708,18.709 pad.3@13.843,32.69 R4.1@16.916,32.741 | length 32.8
  Top Layer w0.635: P4.2@3.708,18.709 9.209,18.709 11.1,20.599 11.1,29.87 ; 13.157,33.172 13.157,33.096 11.1,31.039 11.1,30.455 ; 13.259,32.029 11.1,29.87 ; pad.3@13.64,32.766 15.024,32.766 ; pad.3@14.122,32.715 13.36,32.715 11.1,30.455 ; 15.926,32.766 15.024,32.766 ; R4.1@16.916,32.766 15.024,32.766 ; 11.1,29.87 11.1,30.455
GPS_TX: P4.3@3.708,21.234 pad.3@14.834,34.798 R5.1@16.916,34.773 | length 29.4
  Top Layer w0.635: P4.3@3.708,21.234 8.128,21.234 9.703,22.809 9.703,31.318 ; 13.132,35.458 13.081,35.458 9.703,32.08 9.703,31.318 ; R5.1@16.916,34.798 pad.3@14.834,34.798 13.183,34.798 9.703,31.318
NetBT1_1: BT1.1@14.964,11.341 R3.2@17.272,27.94 U2.22@22.954,26.716 | length 28.4
  Top Layer w0.305: R3.2@17.272,27.94 18.161,27.94 ; U2.22@22.954,26.716 21.29,26.716 ; 18.161,27.94 20.066,27.94 21.29,26.716 ; 18.161,27.94 19.385,26.716 21.29,26.716
  Top Layer w1.143: BT1.1@14.964,11.341 14.964,11.738 20.523,17.297 v2(20.523,21.742)
  Bottom Layer w1.143: v2(19.685,27.305) 19.685,24.46 20.523,23.622 v2(20.523,21.742)
NetC7_2: C7.2@37.49,21.92 R2.2@37.49,19.761 U2.1@35.174,24.541 | length 6.7
  Top Layer w0.508: U2.1@35.174,24.541 36.825,24.541 37.49,23.876 C7.2@37.49,21.92 R2.2@37.49,19.761
NetD1_2: D1.2@18.7,30.353 R3.1@14.986,27.94 | length 4.7
  Top Layer w0.305: R3.1@14.986,27.94 16.129,29.083 17.43,29.083 D1.2@18.7,30.353
NetLED1_1: LED1.1@45.339,26.289 R1.2@45.339,29.591 | length 3.3
  Top Layer w0.508: LED1.1@45.339,26.289 R1.2@45.339,29.591
NetP3_1: P3.1@45.593,37.338 U2.11@35.154,37.416 | length 10.5
  Top Layer w0.508: U2.11@35.154,37.416 45.515,37.416 P3.1@45.593,37.338
NetR4_2: R4.2@19.202,32.741 U2.21@22.954,27.816 | length 7.5
  Top Layer w0.305: R4.2@19.202,32.741 20.295,31.648 20.295,28.753 21.232,27.816 U2.21@22.954,27.816
NetR5_2: R5.2@19.202,34.773 U2.20@22.954,28.916 | length 8.4
  Top Layer w0.305: R5.2@19.215,34.785 20.879,33.122 20.879,29.388 21.351,28.916 U2.20@22.954,28.916
NetR6_1: R6.1@39.116,32.385 U2.8@35.15,34.116 | length 4.7
  Top Layer w0.508: U2.8@35.15,34.116 37.385,34.116 R6.1@39.116,32.385
NetR6_2: R6.2@39.116,34.671 U2.9@35.154,35.216 | length 4.2
  Top Layer w0.508: U2.9@35.154,35.216 38.571,35.216 R6.2@39.116,34.671
pads on no net: 1PPS.1@39.726,-23.152 1PPS.1@89.726,26.848 1PPS.1@89.726,-23.152 BT1.1@14.964,-38.659 BT1.1@64.964,11.341 BT1.1@64.964,-38.659 BT1.2@37.262,-38.672 BT1.2@87.262,11.328 BT1.2@87.262,-38.672 C1.1@15.418,-5.271 C1.1@65.418,44.729 C1.1@65.418,-5.271 C1.2@15.418,-2.985 C1.2@65.418,47.015 C1.2@65.418,-2.985 C2.1@13.005,-6.546 C2.1@63.005,43.454 C2.1@63.005,-6.546 C2.2@13.005,-3.117 C2.2@63.005,46.883 C2.2@63.005,-3.117 C3.1@24.816,-2.944 C3.1@74.816,47.056 C3.1@74.816,-2.944 C3.2@24.816,-5.23 C3.2@74.816,44.77 C3.2@74.816,-5.23 C4.1@27.229,-3.107 C4.1@77.229,46.893 C4.1@77.229,-3.107 C4.2@27.229,-6.536 C4.2@77.229,43.464 C4.2@77.229,-6.536 C5.1@14.986,-24.219 C5.1@64.986,25.781 C5.1@64.986,-24.219 C5.2@17.272,-24.219 C5.2@67.272,25.781 C5.2@67.272,-24.219 C6.1@15.108,-26.505 C6.1@65.108,23.495 C6.1@65.108,-26.505 C6.2@18.537,-26.505 C6.2@68.537,23.495 C6.2@68.537,-26.505 C7.1@39.776,-28.08 C7.1@89.776,21.92 C7.1@89.776,-28.08 C7.2@37.49,-28.08 C7.2@87.49,21.92 C7.2@87.49,-28.08 D1.1@15.2,-19.647 D1.1@65.2,30.353 D1.1@65.2,-19.647 D1.2@18.7,-19.647 D1.2@68.7,30.353 D1.2@68.7,-19.647 LED1.1@45.339,-23.711 LED1.1@95.339,26.289 LED1.1@95.339,-23.711 LED1.2@45.339,-26.251 LED1.2@95.339,23.749 LED1.2@95.339,-26.251 P1.1@3.784,-18.631 P1.1@53.784,31.369 P1.1@53.784,-18.631 P1.2@3.809,-16.081 P1.2@53.809,33.919 P1.2@53.809,-16.081 P2.1@45.593,-37.173 P2.1@95.593,12.827 P2.1@95.593,-37.173 P2.2@43.103,-34.683 P2.2@43.103,-39.763 P2.2@48.177,-39.757 P2.2@48.183,-34.683 P2.2@93.103,10.237 P2.2@93.103,15.317 P2.2@93.103,-34.683 P2.2@93.103,-39.763 P2.2@98.177,10.243 P2.2@98.177,-39.757 P2.2@98.183,15.317 P2.2@98.183,-34.683 P3.1@45.593,-12.662 P3.1@95.593,37.338 P3.1@95.593,-12.662 P3.2@43.103,-10.172 P3.2@43.103,-15.252 P3.2@48.177,-15.246 P3.2@48.183,-10.172 P3.2@93.103,34.748 P3.2@93.103,39.828 P3.2@93.103,-10.172 P3.2@93.103,-15.252 P3.2@98.177,34.754 P3.2@98.177,-15.246 P3.2@98.183,39.828 P3.2@98.183,-10.172 P4.1@3.708,-33.871 P4.1@53.708,16.129 P4.1@53.708,-33.871 P4.2@3.708,-31.291 P4.2@53.708,18.709 P4.2@53.708,-31.291 P4.3@3.708,-28.766 P4.3@53.708,21.234 P4.3@53.708,-28.766 P4.4@3.708,-26.251 P4.4@53.708,23.749 P4.4@53.708,-26.251 R1.1@43.053,-20.409 R1.1@93.053,29.591 R1.1@93.053,-20.409 R1.2@45.339,-20.409 R1.2@95.339,29.591 R1.2@95.339,-20.409 R2.1@39.776,-30.239 R2.1@89.776,19.761 R2.1@89.776,-30.239 R2.2@37.49,-30.239 R2.2@87.49,19.761 R2.2@87.49,-30.239 R3.1@14.986,-22.06 R3.1@64.986,27.94 R3.1@64.986,-22.06 R3.2@17.272,-22.06 R3.2@67.272,27.94 R3.2@67.272,-22.06 R4.1@16.916,-17.259 R4.1@66.916,32.741 R4.1@66.916,-17.259 R4.2@19.202,-17.259 R4.2@69.202,32.741 R4.2@69.202,-17.259 R5.1@16.916,-15.227 R5.1@66.916,34.773 R5.1@66.916,-15.227 R5.2@19.202,-15.227 R5.2@69.202,34.773 R5.2@69.202,-15.227 R6.1@39.116,-17.615 R6.1@89.116,32.385 R6.1@89.116,-17.615 R6.2@39.116,-15.329 R6.2@89.116,34.671 R6.2@89.116,-15.329 U1.1@22.391,-2.348 U1.1@72.391,47.652 U1.1@72.391,-2.348 U1.2@20.091,-2.348 U1.2@70.091,47.652 U1.2@70.091,-2.348 U1.3@17.791,-2.348 U1.3@67.791,47.652 U1.3@67.791,-2.348 U1.4@20.091,-8.548 U1.4@70.091,41.452 U1.4@70.091,-8.548 U2.1@35.174,-25.459 U2.1@85.174,24.541 U2.1@85.174,-25.459 U2.2 U2.3@35.154,-23.284 U2.3@85.154,26.716 U2.3@85.154,-23.284 U2.4 U2.5 U2.6 U2.7 U2.8@35.15,-15.884 U2.8@85.15,34.116 U2.8@85.15,-15.884 U2.9@35.154,-14.784 U2.9@85.154,35.216 U2.9@85.154,-14.784 U2.10@35.154,-13.684 U2.10@85.154,36.316 U2.10@85.154,-13.684 U2.11@35.154,-12.584 U2.11@85.154,37.416 U2.11@85.154,-12.584 U2.12@35.154,-11.484 U2.12@85.154,38.516 U2.12@85.154,-11.484 U2.13@22.954,-11.484 U2.13@72.954,38.516 U2.13@72.954,-11.484 U2.14 U2.15 U2.16 U2.17 U2.18 U2.19 U2.20@22.954,-21.084 U2.20@72.954,28.916 U2.20@72.954,-21.084 U2.21@22.954,-22.184 U2.21@72.954,27.816 U2.21@72.954,-22.184 U2.22@22.954,-23.284 U2.22@72.954,26.716 U2.22@72.954,-23.284 U2.23@22.954,-24.384 U2.23@72.954,25.616 U2.23@72.954,-24.384 U2.24@22.974,-25.459 U2.24@72.974,24.541 U2.24@72.974,-25.459